# EAGLE board NSE2022 Electro_ESPtest ver.1 (EAGLE 9.6.0)

Size 85 x 85 mm. Coordinates in mm from the lower left corner, seen from the top.
Outline: circle at 42.5,42.5 radius 42.5
Copper layers (1*16): Top 0.035mm / dielectric 1.5mm / Bottom 0.035mm
Design rules "PCBGoGo": minimum track width 6mil, minimum drill 0.2mm, track to track 6mil, track to pad 6mil, pad to pad 6mil, via to via 6mil, smd to smd 6mil, copper to edge 0.2mm, drill to drill 6mil, minimum pad ring 10mil, minimum via ring 8mil, stop-mask expansion 4mil, vias tented up to drill 0mil, thermal gap 10mil
Net classes: 1 esp: width 0.254 mm, drill 0.127 mm, clearance 0.025 mm

## Footprints (pad centres in the part's own frame; a part is rotated, then mirrored left to right if it is on the bottom)
AZ1117CH-3.3TRG1 = smd 1.2 x 2.2: 1_GND -2.3,-6.2; 2_OUTPUT 0,-6.2; 3_INPUT 2.3,-6.2 | smd 3.5 x 2.2: VOUT 0,0
GY-68 = drill 0.8: P1 -5,4; P2 -5,1.46; P3 -5,-1.08; P4 -5,-3.62
BMX055 = drill 0.65 pad 1.5 square: 3V3 8.81,-9.53; GND 1.19,-4.46; SCL 1.19,-9.53; SDA 1.19,-7; VCC 8.81,-4.46; VCCIO 8.81,-7
C0603 = smd 1.1 x 1: 1 -0.85,0; 2 0.85,0
C0402 = smd 0.7 x 0.9: 1 -0.65,0; 2 0.65,0
E2,5-5 = drill 0.813 pad 1.6: + -1.27,0 | drill 0.813 pad 1.6 octagon: - 1.27,0
DM3AT = smd 0.7 x 1.9: CD/DAT3 2.2,6.4; CLK -1.1,6.4; CMD 1.1,6.4; DAT0 -3.3,6.4; DAT1 -4.4,6.4; DAT2 3.3,6.4; DET_B -5.5,6.4; VDD 0,6.4; VSS -2.2,6.4 | smd 1.2 x 0.8: DET_A -6.7,-4.5 | smd 1 x 1.9: P$9 4.8,6.381 | smd 1.2 x 1.2: P$11 -6.7,1.7 | smd 1.2 x 2.8: P$13 -7.081,-7.973 | smd 1.9 x 1.9: P$14 7.054,-8.562
2.5_MINI-SPOX_2PIN = drill 1 square: 1 -1.27,0; 2 1.27,0
2.5_MINI-SPOX_3PIN = drill 1 square: 1 -1.27,0; 2 1.27,0; 3 3.81,0
DO35-7 = drill 0.813 long: A 3.81,0; C -3.81,0
5V1A_M78AR05-1 = drill 0.75 pad 1.27 square: GND 0,0; VIN 2.54,0; VOUT -2.54,0
IM920_BOARD = drill 0.65 pad 0.813 square: IO1 7.24,-17.27; IO2 7.24,-16; IO3 5.97,-17.27; IO4 5.97,-16; IO5 4.7,-17.27; IO6 4.7,-16; IO7 3.43,-17.27; IO8 3.43,-16; IO9 2.16,-17.27; IO10 2.16,-16; IO11 0.89,-17.27; IO12 0.89,-16; IO13 -0.38,-17.27; IO14 -0.38,-16; IO15 -1.65,-17.27; IO16 -1.65,-16; IO17 -2.92,-17.27; IO18 -2.92,-16; IO19 -4.19,-17.27; IO20 -4.19,-16; IO21 -5.46,-17.27; IO22 -5.46,-16; IO23 -6.73,-17.27; IO24 -6.73,-16; IO25 -8,-17.27; IO26 -8,-16 | hole 2.2: -14,-16.27; 14,-16.27; 0,17.73
19_2.54 = drill 0.6 pad 1.27 square: 1 0,12.7; 2 0,10.16; 3 0,7.62; 4 0,5.08; 5 0,2.54; 6 0,0; 7 0,-2.54; 8 0,-5.08; 9 0,-7.62; 10 0,-10.16; 11 0,-12.7; 12 0,-15.24; 13 0,-17.78; 14 0,-20.32; 15 0,-22.86; 16 0,-25.4; 17 0,-27.94; 18 0,-30.48; 19 0,-33.02
7_2.54 = drill 0.6 pad 1.27 square: P$1 0,7.62; P$2 0,5.08; P$3 0,2.54; P$4 0,0; P$5 0,-2.54; P$6 0,-5.08; P$7 0,-7.62
OSXX1608C1A = smd 0.8 x 0.8: AN -0.75,0; CT 0.75,0
SSM6J808R = smd 0.44 x 0.33: D1 0,0; D2 0.95,0; D3 0.01,2.64; D4 0.95,2.64; G 1.9,0; S 1.9,2.64
R0201 = smd 0.28 x 0.43: 1 -0.255,0; 2 0.255,0
0207/10 = drill 0.813 octagon: 1 -5.08,0; 2 5.08,0
TS-06104 = smd 1 x 1.8: A -2.25,4.1; B -2.25,-4.1; C 2.25,4.1; D 2.25,-4.1
SRIDE_SWITCH = drill 1: L -2.5,0; LR 0,0; R 2.5,0
NPN_SS8050-G = smd 0.6 x 0.8: 1 -0.95,-2.02; 2 0.95,-2.02; 3 0,0
ESD5484FCT5G = smd 0.28 x 0.3: 1_CT -0.235,0; 2_AN 0.235,0
QFN50P500X500X80-29N = smd 1.01 x 0.27: 1 -2.36,1.5; 2 -2.36,1; 3 -2.36,0.5; 4 -2.36,0; 5 -2.36,-0.5; 6 -2.36,-1; 7 -2.36,-1.5; 15 2.36,-1.5; 16 2.36,-1; 17 2.36,-0.5; 18 2.36,0; 19 2.36,0.5; 20 2.36,1; 21 2.36,1.5 | smd 0.27 x 1.01: 8 -1.5,-2.36; 9 -1,-2.36; 10 -0.5,-2.36; 11 0,-2.36; 12 0.5,-2.36; 13 1,-2.36; 14 1.5,-2.36; 22 1.5,2.36; 23 1,2.36; 24 0.5,2.36; 25 0,2.36; 26 -0.5,2.36; 27 -1,2.36; 28 -1.5,2.36 | smd 3.25 x 3.25: 29 0,0
ESP32-WROOM-32D = smd 2 x 0.9: 1_GND -7.5,7.62; 2_3V3 -7.5,6.35; 3_EN -7.5,5.08; 4_SENSOR_VP -7.5,3.81; 5_SENSOR_VN -7.5,2.54; 6_IO34 -7.5,1.27; 7_IO35 -7.5,0; 8_IO32 -7.5,-1.27; 9_IO33 -7.5,-2.54; 10_IO25 -7.5,-3.81; 11_IO26 -7.5,-5.08; 12_IO27 -7.5,-6.35; 13_IO14 -7.5,-7.62; 14_IO12 -7.5,-8.89; 25_IO0 9.5,-8.89; 26_IO4 9.5,-7.62; 27_IO16 9.5,-6.35; 28_IO17 9.5,-5.08; 29_IO5 9.5,-3.81; 30_IO18 9.5,-2.54; 31_IO19 9.5,-1.27; 32_NC 9.5,0; 33_IO21 9.5,1.27; 34_RXD0 9.5,2.54; 35_TXD0 9.5,3.81; 36_IO22 9.5,5.08; 37_IO23 9.5,6.35; 38_GND 9.5,7.62 | smd 0.9 x 2: 15_GND -4.715,-10.1; 16_IO13 -3.445,-10.1; 17_SD2 -2.175,-10.1; 18_SD3 -0.905,-10.1; 19_CMD 0.365,-10.1; 20_CLK 1.635,-10.1; 21_SD0 2.905,-10.1; 22_SD1 4.175,-10.1; 23_IO15 5.445,-10.1; 24_IO2 6.715,-10.1 | smd 1.33 x 1.33: GND@1 -1.8,1.835; GND@2 0,1.835; GND@3 1.835,1.835; GND@4 -1.8,0; GND@5 0,0; GND@6 1.835,0; GND@7 -1.8,-1.835; GND@8 0,-1.835; GND@9 1.835,-1.835
AE-GYSFDMAXB = drill 0.8 long: P1 13.716,5.08; P2 13.716,2.54; P3 13.716,0; P4 13.716,-2.54; P5 13.716,-5.08 | hole 3.2: -12,12; 12,12; 12,-12; -12,-12
MICRO-B_ZX62R-B-5P = smd 0.4 x 1.35: 1 1.3,0; 2 0.65,0; 3 0,0; 4 -0.65,0; 5 -1.3,0 | smd 2.1 x 2: P$6 3.1,-0.325; P$7 -3.1,-0.325 | smd 1.6 x 1.9: P$8 -4.1,-2.675; P$9 4.1,-2.675 | smd 1.2 x 1.9: P$10 0.85,-2.675; P$11 -0.9,-2.675

## Placement (x,y rotation side)
3-REG1  5-3.3  [AZ1117CH-3.3TRG1]  25.95,9.1 90 top
BMP1  BMP180  [GY-68]  71.9,28.39 270 top
BMX1  BMX055  [BMX055]  48.87,33.14 90 top
C1  22uf  [C0603]  33.11,22.95 90 top
C2  22uf  [C0603]  23.59,23.11 90 top
C3  0.1uF  [C0603]  24.14,31.42 180 top
C4  0.1uF  [C0603]  31.12,31.42 180 top
C5  4.7uF  [C0402]  29.42,23.01 90 top
C6  0.1uF  [C0603]  26.39,23.01 90 top
C7  0.1uF  [C0603]  53.03,49.71 0 top
C8  22uF  [C0603]  53.03,45.17 0 top
C9  0.1uF  [C0603]  47.73,45.44 180 top
C10  10uF  [E2,5-5]  105.83,109.75 270 top  (outside the outline)
C11  3.3uF  [E2,5-5]  114.98,85.75 0 top  (outside the outline)
CN1  DM3AT  [DM3AT]  73.35,45.54 90 top
CON1  FP  [2.5_MINI-SPOX_2PIN]  105.83,101.87 270 top  (outside the outline)
CON2  BATT  [2.5_MINI-SPOX_2PIN]  105.83,92.98 270 top  (outside the outline)
CON3  SV1  [2.5_MINI-SPOX_3PIN]  90.22,25.96 270 top  (outside the outline)
CON4  SV2  [2.5_MINI-SPOX_3PIN]  90.22,14.53 270 top  (outside the outline)
CON5  SV3  [2.5_MINI-SPOX_3PIN]  96.83,25.96 270 top  (outside the outline)
CON6  SV4  [2.5_MINI-SPOX_3PIN]  96.83,14.53 270 top  (outside the outline)
D1  1N4148DO35-7  [DO35-7]  119.17,101.75 90 top  (outside the outline)
DCDC1  12-5  [5V1A_M78AR05-1]  116.25,94.13 0 top  (outside the outline)
IM1  IM920IM920_BOARD  [IM920_BOARD]  24.62,60 0 top
JP1  19pin  [19_2.54]  104.31,66.06 0 top  (outside the outline)
JP2  7pin  [7_2.54]  -15.29,23.8 0 top  (outside the outline)
JP3  19pin  [19_2.54]  106.85,66.06 0 top  (outside the outline)
L1  OSXX1608C1A  [OSXX1608C1A]  21.74,10.99 90 top
MOS1  [SSM6J808R]  113.33,100.6 180 top  (outside the outline)
MOS2  [SSM6J808R]  116.63,100.6 180 top  (outside the outline)
MOS3  [SSM6J808R]  113.33,104.41 180 top  (outside the outline)
R1  2k  [R0201]  19.73,12.99 90 top
R2  10k  [R0201]  25.41,27.74 180 top
R3  10k  [R0201]  27.57,27.87 0 top
R4  2k  [R0201]  20.74,12.76 90 top
R5  10k  [R0201]  18.74,11.77 270 top
R6  22k  [R0201]  16.17,15.28 180 top
R7  47k  [R0201]  16.17,16.55 0 top
R8  10k  [R0201]  55.45,63.17 0 top
R9  10k  [R0201]  53.79,65.71 180 top
R10  10k  [R0201]  57.48,55.04 90 top
R11  10k  [R0201]  51.63,45.52 0 top
R12  1k  [0207/10]  109.52,99.33 90 top  (outside the outline)
R13  10k  [0207/10]  114.34,107.97 0 top  (outside the outline)
R14  1k  [0207/10]  114.34,111.4 180 top  (outside the outline)
R15  100k  [0207/10]  -9.45,26.34 90 top  (outside the outline)
R16  100k  [0207/10]  -12.12,21.26 270 top  (outside the outline)
SW1  [TS-06104]  43.14,37.25 0 top
SW2  [TS-06104]  35.12,37.25 0 top
SW3  [SRIDE_SWITCH]  107.1,85.36 0 top  (outside the outline)
T1  [NPN_SS8050-G]  29.85,29.9 0 top
T2  [NPN_SS8050-G]  25.41,29.9 0 top
TVC1  [ESD5484FCT5G]  16.17,13.88 0 top
TVC2  [ESD5484FCT5G]  16.17,12.87 0 top
TVC3  [ESD5484FCT5G]  16.17,11.85 0 top
U1  CP2102N-A01-GQFN28  [QFN50P500X500X80-29N]  29.06,17.03 90 top
U2  [ESP32-WROOM-32D]  45.63,19.08 180 top
U$1  AE-GYSFDMAXB  [AE-GYSFDMAXB]  55.87,63.81 270 top
U$2  [LOGO]  4.52,58.22 0 top
USB1  [MICRO-B_ZX62R-B-5P]  13.81,22.58 270 top

## Library data of the parts
3-REG1 = Chip 3-Terminal Regulator
BMP1 = BMP180
BMX1 = BMX055
C1-C11 = rcl; SPICEPREFIX: C
CN1 = microSD
CON1-CON6 = Connector
D1 = diode
DCDC1 = DC-DC
IM1 = IM920
JP1-JP3 = JumperPins
L1 = ChipLED
MOS1-MOS3 = Chip MOSFET
R1-R16 = rcl; SPICEPREFIX: R
SW1-SW3 = Switches
T1 T2 = Chip Transister
TVC1-TVC3 = TVC Diode
U1 = CP2102N-A01-GQFN28; AVAILABILITY: In Stock; DESCRIPTION: USB Bridge, USB to UART USB 2.0 UART Interface 28-QFN (5x5); MF: Silicon Labs; MP: CP2102N-A01-GQFN28; PACKAGE: QFN-28 Silicon Labs; PRICE: None; PURCHASE-URL: https://pricing.snapeda.com/search/part/CP2102N-A01-GQFN28/?ref=eda
U2 = ESP32
U$1 = AE-GYSFDMAXB
U$2 = logo
USB1 = USB

## Nets
+3V3 [esp]: 3-REG1.2_OUTPUT 3-REG1.VOUT BMP1.P1 BMX1.3V3 C1.1 C5.1 C6.1 C7.1 C8.1 CN1.VDD IM1.IO23 JP1.1 JP2.P$4 MOS3.S R4.1 R8.1 R10.1 R11.2 U1.6 U1.7 U2.2_3V3
+5V [esp]: 3-REG1.3_INPUT C2.1 CON3.2 CON4.2 CON5.2 CON6.2 JP1.19 R1.2 R6.1 SW3.LR TVC1.2_AN U$1.P1 USB1.1
+D [esp]: TVC3.2_AN U1.4 USB1.3
-D [esp]: TVC2.2_AN U1.5 USB1.2
BATT: CON2.2 MOS1.S
CLK [esp]: JP3.1 U2.20_CLK
CMD [esp]: JP1.18 U2.19_CMD
CPVBUS [esp]: R6.2 R7.2 U1.8
CTS [esp]: U1.23
DCD [esp]: U1.1
DSR [esp]: U1.27
DTR [esp]: JP2.P$7 R3.1 R16.2 T2.2 U1.28
EN [esp]: C4.1 C9.1 JP1.2 R11.1 SW2.D T1.3 U2.3_EN
FP: CON1.2 D1.A MOS1.G MOS2.G MOS3.G R12.2
FP_CHECKER: C10.+ JP1.7 R14.2 U2.8_IO32
GND [esp]: 3-REG1.1_GND BMP1.P2 BMX1.GND C1.2 C2.2 C3.2 C4.2 C5.2 C6.2 C7.2 C8.2 C9.2 C10.- C11.- CN1.VSS CON1.1 CON2.1 CON3.3 CON4.3 CON5.3 CON6.3 DCDC1.GND IM1.IO18 IM1.IO19 IM1.IO24 JP1.14 JP2.P$2 JP3.13 JP3.19 L1.CT R5.2 R7.1 R9.1 R12.1 R13.1 R15.1 R16.1 SW1.B SW2.B TVC1.1_CT TVC2.1_CT TVC3.1_CT U1.3 U1.29 U2.1_GND U2.15_GND U2.38_GND U2.GND@1 U2.GND@2 U2.GND@3 U2.GND@4 U2.GND@5 U2.GND@6 U2.GND@7 U2.GND@8 U2.GND@9 U$1.P2 USB1.5
GPSRX: JP3.5 U2.24_IO2 U$1.P4
GPSTX: JP3.4 U2.23_IO15 U$1.P3
IMBUSY: IM1.IO1 JP1.12 U2.13_IO14
IMRX: IM1.IO7 JP3.8 U2.27_IO16
IMTX: IM1.IO6 JP3.9 U2.28_IO17
IO0 [esp]: C3.1 JP3.6 SW1.D T2.3 U2.25_IO0
IO4 [esp]: JP3.7 U2.26_IO4
IO12 [esp]: JP1.13 U2.14_IO12
IO13 [esp]: JP1.15 U2.16_IO13
IO34 [esp]: JP1.5 U2.6_IO34
IO35 [esp]: JP1.6 U2.7_IO35
MISO: CN1.DAT0 JP3.12 U2.31_IO19
MODE1: IM1.IO17 R8.2
MOSI: CN1.CMD JP3.18 R10.2 U2.37_IO23
N$1 [esp]: L1.AN R1.1
N$2 [esp]: R3.2 T1.1
N$5 [esp]: R2.2 T2.1
N$8 [esp]: R4.2 U1.9
N$10 [esp]: R5.1 U1.11
N$11: D1.C DCDC1.VIN MOS2.S
N$12: MOS1.D1 MOS1.D2 MOS1.D3 MOS1.D4 MOS2.D1 MOS2.D2 MOS2.D3 MOS2.D4
N$13: C11.+ DCDC1.VOUT SW3.L
N$14: MOS3.D1 MOS3.D2 MOS3.D3 MOS3.D4 R13.2 R14.1
NC [esp]: U2.32_NC
RI [esp]: U1.2
RTS [esp]: JP2.P$1 R2.1 R15.2 T1.2 U1.24
RXD [esp]: JP2.P$6 JP3.16 U1.25 U2.35_TXD0
S_VN [esp]: JP1.4 U2.5_SENSOR_VN
S_VP [esp]: JP1.3 U2.4_SENSOR_VP
SCK: CN1.CLK JP3.11 U2.30_IO18
SCL: BMP1.P3 BMX1.SCL JP3.17 U2.36_IO22
SD0 [esp]: JP3.2 U2.21_SD0
SD1 [esp]: JP3.3 U2.22_SD1
SD2 [esp]: JP1.16 U2.17_SD2
SD3 [esp]: JP1.17 U2.18_SD3
SDA: BMP1.P4 BMX1.SDA JP3.14 U2.33_IO21
SS: CN1.CD/DAT3 JP3.10 U2.29_IO5
STATUS: IM1.IO21 R9.2
SV1: CON3.1 JP1.11 U2.12_IO27
SV2: CON4.1 JP1.10 U2.11_IO26
SV3: CON5.1 JP1.9 U2.10_IO25
SV4: CON6.1 JP1.8 U2.9_IO33
TXD [esp]: JP2.P$5 JP3.15 U1.26 U2.34_RXD0
VCC: BMX1.VCC
VCCIO: BMX1.VCCIO

## Tracks (layer width: path | path; a pad name or v marks a point on that pad's centre or on a via)
+3V3  (20 unrouted)
+5V  (12 unrouted)
+D  (2 unrouted)
-D  (2 unrouted)
BATT  (1 unrouted)
CLK  (1 unrouted)
CMD  (1 unrouted)
CPVBUS  (2 unrouted)
DTR  (4 unrouted)
EN  (6 unrouted)
FP  (5 unrouted)
FP_CHECKER  (3 unrouted)
GND  (57 unrouted)
GPSRX  (2 unrouted)
GPSTX  (2 unrouted)
IMBUSY  (2 unrouted)
IMRX  (2 unrouted)
IMTX  (2 unrouted)
IO0  (4 unrouted)
IO4  (1 unrouted)
IO12  (1 unrouted)
IO13  (1 unrouted)
IO34  (1 unrouted)
IO35  (1 unrouted)
MISO  (2 unrouted)
MODE1  (1 unrouted)
MOSI  (3 unrouted)
N$1  (1 unrouted)
N$2  (1 unrouted)
N$5  (1 unrouted)
N$8  (1 unrouted)
N$10  (1 unrouted)
N$11  (2 unrouted)
N$12  (7 unrouted)
N$13  (2 unrouted)
N$14  (5 unrouted)
RTS  (4 unrouted)
RXD  (3 unrouted)
S_VN  (1 unrouted)
S_VP  (1 unrouted)
SCK  (2 unrouted)
SCL  (3 unrouted)
SD0  (1 unrouted)
SD1  (1 unrouted)
SD2  (1 unrouted)
SD3  (1 unrouted)
SDA  (3 unrouted)
SS  (2 unrouted)
STATUS  (1 unrouted)
SV1  (2 unrouted)
SV2  (2 unrouted)
SV3  (2 unrouted)
SV4  (2 unrouted)
TXD  (3 unrouted)

## Text on the board
tPlace: 3v3 | CLK | EN | SD0 | SVP | SD1 | SVN | GPSTX | IO34 | GPSRX | IO35 | IO0 | FC | IO4 | SV4 | IMRX | SV3 | IMTX | SV2 | SS | SV1 | SCK | IMB | MISO | IO12 | GND | GND | SDA | IO13 | TXD | SD2 | RXD | SD3 | SCL | CMD | MOSI | 5V | GND | RTS | GND | CTS | 3V3 | TXD | RXD | DTR